# Altium PCB InfoDisplay.PcbDoc (part 2 of 2)
Units mil, origin at the board's own origin, x right, y up, seen from the top; angles counter-clockwise.
Board outline 4606.3 x 1732.28 mil, 2 copper layers (Top Layer, Bottom Layer), stack 65.792 mil thick; 219 components, 174 nets, 685 pads, 194 vias.
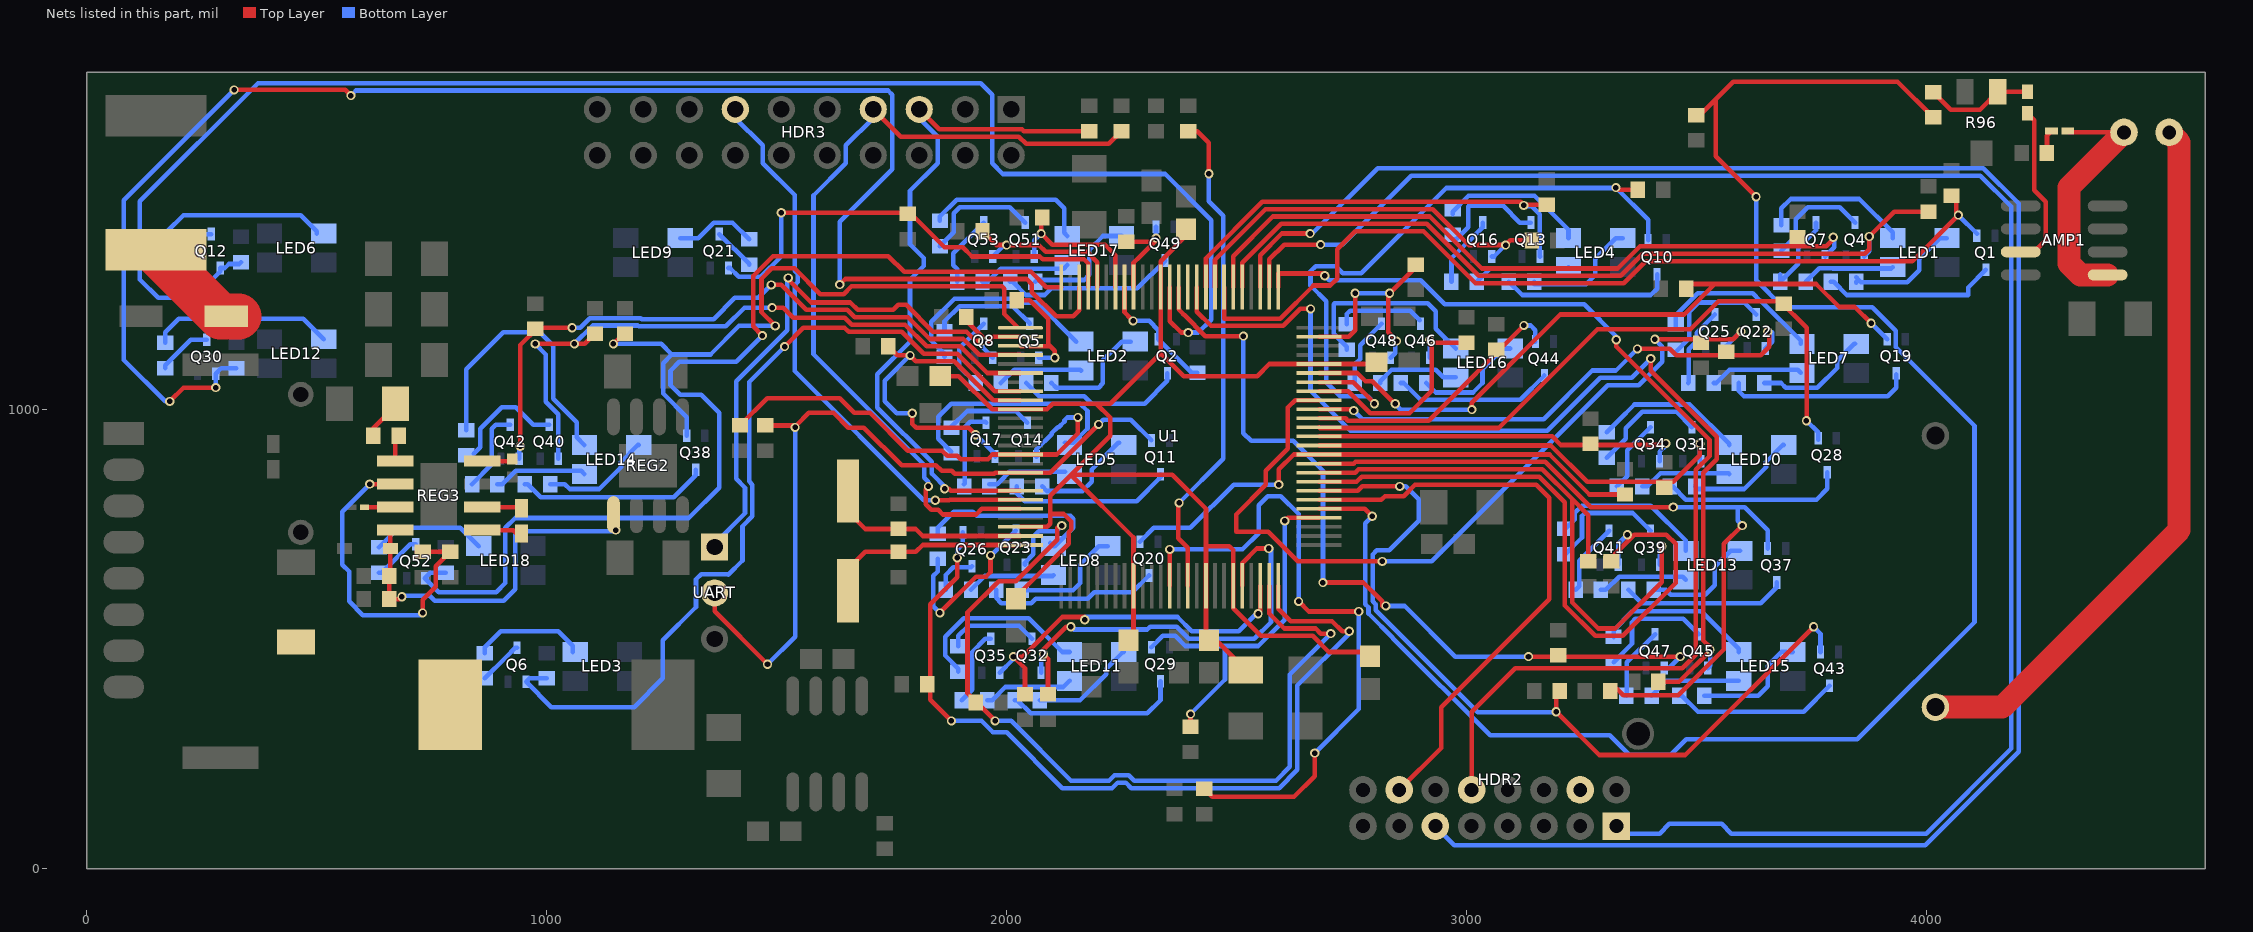
[diagram p2: the nets of this part, all layers, seen from the top]

## Via types
v1: diameter 20, hole 12, Top Layer to Bottom Layer, tented both sides, 181 vias
v2: diameter 19.68, hole 7.87, Top Layer to Bottom Layer, 6 vias
v3: diameter 137.8, hole 98.43, Top Layer to Bottom Layer, 4 vias
v4: diameter 50, hole 28, Top Layer to Bottom Layer, 2 vias
v5: diameter 20, hole 12, Top Layer to Bottom Layer, 1 vias

## Nets (pads, with @x,y where several pads share a name; then routed paths per layer and width w, separated by ;. In a path a pad name is that pad's centre, name@x,y a point inside that pad or via, vN(x,y) a via of type N, cw(c..) or ccw(c..) an arc to the next point about the centre after c; other vN are vias at no path point) (continued)
JTAG_TDI: HDR3.5 R3.1 U1.19 | length 1545.2
  Top Layer w10: HDR3.5@1810,1651.65 1853.47,1608.18 2033.42,1608.18 2037.5,1604.09 R3.1@2180,1604.1 ; v1(1865,826.65) 1874.54,826.65 1878.87,822.32 U1.19@2030,822.32
  Bottom Layer w10: HDR3.5@1810,1651.65 1810,1632.71 1850.53,1592.18 1850.53,1534.87 1790,1474.34 1790,1358.35 1820,1328.35 1820,1310.96 1790,1280.96 1790,1146.35 1719,1075.35 1719,1002.96 1837,884.96 1837,859.65 1870,826.65 v1(1865,826.65)
JTAG_TDO: HDR3.13 U1.20 | length 1236
  Top Layer w10: v1(1845,801.65) 1875,801.65 1875.99,802.64 U1.20@2030,802.64
  Bottom Layer w10: HDR3.13@1410,1651.65 1410,1632.71 1469.47,1573.24 1469.47,1534.87 1539,1465.34 1539,1300.7 1546,1293.7 1546,1276.3 1539,1269.3 1539,1082.65 1820,801.65 v1(1845,801.65)
JTAG_TMS: HDR3.7 R2.1 U1.21 | length 1821.4
  Top Layer w10: HDR3.7@1710,1651.65 1769.47,1592.18 2026.79,1592.18 2042.31,1576.65 2222.56,1576.65 R2.1@2250,1604.1 ; v1(1830,831.65) 1824,825.65 1824,792.96 1836.3,780.65 1851.3,780.65 1861.3,770.65 1933.7,770.65 1946,782.95 U1.21@2030,782.95
  Bottom Layer w10: HDR3.7@1710,1651.65 1710,1632.71 1650.53,1573.24 1650.53,1534.87 1580,1464.34 1580,1119.33 1821,878.33 1821,850.65 1830,841.65 v1(1830,831.65)
LED_B_BATTERY: Q26.2 R71.1 U1.50 | length 1869.8
  Top Layer w10: v1(1880,321.65) 1834,367.65 1834,575.35 1892.5,633.85 v1(1892.5,676.65) ; U1.50@2591.02,615.63 2591.02,565.63 2618,538.65 2707.7,538.65 2729.7,516.65 v1(2745,516.65)
  Bottom Layer w10: v1(1880,321.65) 1945.3,321.65 1970.3,296.65 2000,296.65 2121,175.65 2229.3,175.65 2241.3,187.65 2258.7,187.65 2270.7,175.65 2592.54,175.65 2632,215.11 2632,398.65 2745,511.65 v1(2745,516.65) ; v1(1892.5,676.65) 1892.5,694.15 1905,706.65 Q26.2@1905,731.65
LED_B_BRAKING: Q41.2 R83.1 U1.58 | length 1437.4
  Top Layer w10: U1.58@2679.61,842.01 2760.92,842.01 2771.98,853.06 3158.59,853.06 3214,797.65 3214,572.65 3280,506.65 3340,506.65 3455,621.65 3455,706.65 3435,726.65 3365.3,726.65 3315,676.35 R83.1@3315,669.21
  Bottom Layer w10: Q41.2@3330,661.65 3330,706.65 v1(3350,726.65)
LED_B_CHARGING: Q25.2 R70.1 U1.67 | length 1827.7
  Top Layer w10: U1.67@2679.61,1019.17 2627.52,1019.17 2611.64,1003.29 2611.64,913.29 2564,865.65 2564,835.65 2499,770.65 2499,732.65 2569,732.65 2633,668.65 v1(2817,668.65) ; v1(3410,1151.65) 3580,1151.65 v1(3597.19,1168.85)
  Bottom Layer w10: v1(2817,668.65) 2924.22,668.65 3307.41,1051.84 3375.17,1051.84 3426,1102.67 3426,1135.65 v1(3410,1151.65) ; Q25.2@3560,1131.65 v1(3597.19,1168.85)
LED_B_CLUTCH: Q35.2 R78.1 U1.48 | length 811.1
  Top Layer w10: R78.1@2040,379.21 2040,436.65 v1(2015,461.65) 2035,461.65 2121,547.65 2170,547.65 v1(2170,541.65) ; v1(2546.88,554.77) 2551.65,559.54 U1.48@2551.65,615.63
  Bottom Layer w10: Q35.2@1985.3,426.65 2015,456.35 v1(2015,461.65) ; v1(2170,541.65) 2170,547.65 2371.63,547.65 2402.63,516.65 2505,516.65 2543.12,554.77 v1(2546.88,554.77)
LED_B_DONE: Q48.2 R90.1 U1.74 | length 483.8
  Top Layer w10: U1.74@2679.61,1156.97 2744,1156.97 2758,1170.97 v1(2758,1251.65) ; v1(2847.93,1147.72) 2848.94,1147.72 2830,1166.65 2830,1248.65 v1(2833,1251.65) 2890,1308.65 R90.1@2890,1314.21
  Bottom Layer w10: v1(2758,1251.65) v1(2833,1251.65) ; Q48.2@2835,1111.65 2845,1121.65 2845,1141.65 2850,1146.65 2848.94,1147.72 v1(2847.93,1147.72)
LED_B_ENERGIZED: Q34.2 R77.1 U1.63 | length 807.4
  Top Layer w10: U1.63@2679.61,940.43 3186.48,940.43 3205.26,921.65 3430.35,921.65 v1(3433.73,925.03)
  Bottom Layer w10: Q34.2@3420,886.65 3420,906.65 3433.73,920.38 v1(3433.73,925.03)
LED_B_ENGINE: Q17.2 R64.1 U1.9 | length 765.1
  Top Layer w10: R64.1@1742.56,1136.65 1762.56,1116.65 v1(1790,1116.65) 1802.35,1104.31 1886.24,1104.31 1971.37,1019.17 U1.9@2030,1019.17 ; v1(1794.94,990.65) 1794.94,967.47 1803.42,959 1917.65,959 v1(1932.5,944.15)
  Bottom Layer w10: v1(1790,1116.65) 1735,1061.65 1735,1016.65 1761,990.65 v1(1794.94,990.65) ; v1(1932.5,944.15) 1975,901.65 Q17.2@1975,896.65
LED_B_FUEL: Q47.2 R89.1 U1.87 | length 1769.2
  Top Layer w10: U1.87@2374.49,1265.24 2374.49,1216.56 2379.24,1211.82 2379.24,1211.47 2385.68,1205.02 2386.03,1205.02 2432.4,1158.65 v1(2515,1158.65) ; v1(2688,622.65) 2776,622.65 2817,581.65 2817,571.65 v1(2825,571.65) ; v1(3135,461.65) v1(3465,461.65)
  Bottom Layer w10: v1(2515,1158.65) 2515,947.65 2532,930.65 2623,930.65 2688,865.65 v1(2688,622.65) ; v1(2825,571.65) 2866,571.65 2976,461.65 v1(3135,461.65) ; Q47.2@3430,436.65 3440,436.65 v1(3465,461.65)
LED_B_HYBRID: Q16.2 R63.1 U1.83 | length 871.1
  Top Layer w10: U1.83@2453.23,1265.24 2453.23,1324.88 2563,1434.65 2926.63,1434.65 3004.63,1356.65 v1(3085,1356.65) 3095,1366.65 R63.1@3142.44,1366.65
  Bottom Layer w10: Q16.2@3055,1331.65 3060,1331.65 v1(3085,1356.65)
LED_B_LOGGING: Q42.2 R84.1 U1.4 | length 1455
  Top Layer w10: v1(942.5,919.15) 942.5,1139.15 980,1176.65 v1(1055,1176.65) ; v1(1488.35,1270) 1510,1270 1564.35,1215.65 1653.67,1215.65 1669.67,1199.65 1785.6,1199.65 1832.95,1152.31 1906.12,1152.31 1940.83,1117.6 U1.4@2030,1117.6
  Bottom Layer w10: Q42.2@940,891.65 940,916.65 v1(942.5,919.15) ; v1(1055,1176.65) 1072.37,1176.65 1093.37,1197.65 1204.3,1197.65 1206.3,1195.65 1363,1195.65 1409,1241.65 1460,1241.65 v1(1488.35,1270)
LED_B_MOTOR1: Q53.2 R93.1 U1.96 | length 372.1
  Top Layer w10: R93.1@1947.56,1386.65 1977.56,1356.65 v1(2000,1356.65) 2070,1356.65 2085,1341.65 2175,1341.65 2197.32,1319.33 U1.96@2197.32,1265.24
  Bottom Layer w10: Q53.2@1970,1331.65 1995,1356.65 v1(2000,1356.65)
LED_B_MOTOR2: Q8.2 R39.1 U1.2 UART.1 | length 1354.6
  Top Layer w10: v1(1525,1285) 1521.65,1285 1575,1231.65 1660.3,1231.65 1676.3,1215.65 1753.6,1215.65 1764.39,1226.44 1781.44,1226.44 1839.57,1168.31 1912.75,1168.31 1933.19,1147.87 v1(1947.91,1147.87) ; R39.1@1912.56,1191.65 1947.91,1156.3 v1(1947.91,1147.87) ; U1.2@2030,1156.97 1970.32,1156.97 1961.22,1147.87 v1(1947.91,1147.87)
  Bottom Layer w10: UART.1@1365,700 1365,707.37 1431,773.37 1431,829 1411.65,848.35 1411.65,1060 1523,1171.35 1523,1283 v1(1525,1285) ; v1@1947.91,1146.65 1947.91,1133.74 Q8.2@1970,1111.65 ; v1(1947.91,1147.87) v1@1950.4,1145.38
LED_B_READY: Q7.2 R33.1 U1.81 | length 1558.7
  Top Layer w10: U1.81@2492.6,1265.24 2492.6,1332.53 2578.73,1418.65 2920,1418.65 3033,1305.65 3329,1305.65 3377.5,1354.15 3720,1354.15 ; R33.1@3720,1374.09 3720,1354.15 ; v1(3797.81,1373.71) 3800,1371.52 3782.64,1354.15 3720,1354.15
  Bottom Layer w10: Q7.2@3780,1331.65 3800,1351.65 3800,1371.52 v1(3797.81,1373.71)
LED_G_BATTERY: Q23.2 R69.1 U1.49 | length 1957.7
  Top Layer w10: v1(1975,321.65) 1915,381.65 1915,557.92 1982.73,625.65 2020.15,625.65 2110,715.51 2110,741.65 2115,746.65 v1(2120,746.65) ; U1.49@2571.34,615.63 2571.34,555.32 2604,522.65 2672.06,522.65 2683.06,511.65 v1(2705,511.65)
  Bottom Layer w10: v1(1975,321.65) 2010,321.65 2140,191.65 2222.67,191.65 2234.67,203.65 2265.33,203.65 2277.33,191.65 2585.91,191.65 2616,221.74 2616,422.65 v1(2705,511.65) ; Q23.2@2040,661.65 2040,665.95 2058.33,684.28 2058.33,722.86 2069.78,734.31 2107.65,734.31 v1(2120,746.65) v1@2121.66,746.65
LED_G_BRAKING: Q39.2 R81.1 U1.59 | length 1335.2
  Top Layer w10: U1.59@2679.61,861.69 2757.98,861.69 2765.35,869.06 3165.22,869.06 3230,804.28 ; R81.1@3265,669.21 3265,769.28 3230,804.28 ; v1@3420,701.65 3425,696.65 3425,623.65 3324,522.65 3286.63,522.65 3230,579.28 3230,804.28
  Bottom Layer w10: Q39.2@3420,661.65 v1@3420,701.65
  other v1: 3425,701.65
LED_G_CHARGING: Q22.2 R68.1 U1.66 | length 1149
  Top Layer w10: U1.66@2679.61,999.49 2747.16,999.49 2750,996.65 v1(2755,996.65) ; v1(3372,1130.65) 3442.5,1130.65 3456.18,1116.97 3640.32,1116.97 3658.41,1135.06 v1@3658.41,1167.18 ; v1(3655.33,1167.97) v1@3656.11,1167.18
  Bottom Layer w10: v1(2755,996.65) 2774,977.65 3167.75,977.65 3273.93,1083.84 3325.18,1083.84 v1(3372,1130.65) ; Q22.2@3650,1131.65 3665,1146.65 3665,1166.65 3664.47,1167.18 3656.11,1167.18 v1(3655.33,1167.97)
LED_G_CLUTCH: Q32.2 R76.1 U1.46 | length 970.2
  Top Layer w10: R76.1@2090,379.21 2090,456.65 v1(2080,466.65) 2080,476.65 2130,526.65 v1(2140,526.65) ; U1.46@2512.28,615.63 2512.28,664.65 2544.28,696.65 v1(2570,696.65)
  Bottom Layer w10: Q32.2@2075,426.65 2075,461.65 v1(2080,466.65) ; v1(2140,526.65) 2146.25,520.4 2306.25,520.4 2312.5,526.65 2370,526.65 2396,500.65 2539,500.65 2575,536.65 v1@2575,696.65
LED_G_DONE: Q46.2 R88.1 U1.68 | length 520.5
  Top Layer w10: U1.68@2679.61,1038.86 2742.79,1038.86 2791,990.65 2876.29,990.65 2925,1039.37 2925,1136.65 2920,1141.65 v1(2920,1150.4) ; v1@2920,1151.65 2927.56,1144.09 R88.1@3000,1144.09
  Bottom Layer w10: Q46.2@2920,1111.65 v1(2920,1150.4)
LED_G_ECONOMY: Q6.2 R30.2 U1.8 | length 1853.8
  Top Layer w10: v1(1517,1135.65) 1558,1176.65 1647.42,1176.65 1656.42,1167.65 1772.35,1167.65 1819.69,1120.31 1892.87,1120.31 1974.32,1038.86 U1.8@2030,1038.86
  Bottom Layer w10: R30.2@1000,414.09 962.44,414.09 Q6.2@955,406.65 1010,351.65 1190,351.65 1252.5,414.15 1252.5,497.5 1324.47,569.47 1324.47,629.47 1335.53,640.53 1394.47,640.53 1395,640 1425.53,670.53 1425.53,745.27 1447,766.75 1447,835.63 1440,842.63 1440,1058.65 v1(1517,1135.65)
LED_G_ENERGIZED: Q31.2 R75.1 U1.62 | length 949
  Top Layer w10: U1.62@2679.61,920.75 3183.53,920.75 3262.63,841.65 3450,841.65 3507.53,899.18 v1(3507.53,924.66)
  Bottom Layer w10: v1(3507.53,924.66) 3507.53,889.12 Q31.2@3510,886.65
LED_G_ENGINE: Q14.2 R62.1 U1.15 | length 1009.7
  Top Layer w10: R62.1@1420,964.21 1479.44,1023.65 1636.79,1023.65 1668.79,991.65 1702.88,991.65 1784.88,909.65 1859.58,909.65 1870.58,898.65 1893.05,898.65 1900.55,891.15 1959.45,891.15 1969.36,901.06 U1.15@2030,901.06 2109.41,901.06 2155,946.65 v1(2155,981.65)
  Bottom Layer w10: Q14.2@2065,896.65 2065,911.96 2098.33,945.29 2098.33,947.86 2111.12,960.65 2113.7,960.65 2126,972.96 2126,975.53 2132.12,981.65 v1(2155,981.65)
LED_G_FUEL: Q45.2 R87.1 U1.85 | length 2248.9
  Top Layer w10: U1.85@2413.86,1265.24 2413.86,1211.23 2444.43,1180.65 2602.02,1180.65 2639.02,1217.65 v1(2661,1217.65) ; v1(3401,1109.65) 3401,1083.51 3544.53,939.98 3544.53,890.93 3515,861.4 3515,496.65 3530,481.65 v1(3530,476.65) 3530,474.33 3462.33,406.65 R87.1@3417.56,406.65
  Bottom Layer w10: v1(2661,1217.65) 2661,1039.65 2747.95,952.71 3175.49,952.71 3290.62,1067.84 3359.18,1067.84 v1(3401,1109.65) ; Q45.2@3525,436.65 3530,441.65 v1(3530,476.65) v1@3530,481.65
LED_G_HYBRID: Q13.2 R61.1 U1.84 | length 994.5
  Top Layer w10: U1.84@2433.54,1265.24 2433.54,1327.82 2556.37,1450.65 3118,1450.65 3125.29,1443.36 3125.94,1442.71 v1(3124.64,1442.71) 3126.03,1444.09 R61.1@3175,1444.09
  Bottom Layer w10: v1@3130,1441.65 3129,1441.65 3128,1440.65 3142.34,1440.65 3159.19,1423.81 3159.19,1332.46 Q13.2@3160,1331.65
LED_G_LOGGING: Q40.2 R82.1 U1.6 | length 1473.3
  Top Layer w10: v1(975,1141.65) v1(1060,1141.65) 1082.56,1141.65 R82.1@1105,1164.09 ; v1(1490,1220.59) 1514.06,1220.59 1536,1198.65 1648.05,1198.65 1663.05,1183.65 1778.97,1183.65 1826.32,1136.31 1899.5,1136.31 1957.57,1078.23 U1.6@2030,1078.23
  Bottom Layer w10: v1(975,1141.65) 998,1118.65 998,1016.03 1025,989.03 Q40.2@1025,891.65 ; v1(1060,1141.65) 1100,1181.65 1197.67,1181.65 1199.67,1179.65 1389,1179.65 1429.94,1220.59 v1(1490,1220.59)
LED_G_MOTOR1: Q51.2 R92.1 U1.94 | length 342
  Top Layer w10: R92.1@2075,1416.65 v1(2075,1381.65) 2099,1357.65 2214,1357.65 2236.69,1334.96 U1.94@2236.69,1265.24
  Bottom Layer w10: Q51.2@2060,1331.65 2060,1366.65 v1(2075,1381.65)
LED_G_MOTOR2: Q5.2 R24.1 U1.3 | length 274.6
  Top Layer w10: R24.1@2022.56,1236.65 2050,1236.65 2090.21,1196.44 2090.21,1141.44 2095,1136.65 ; U1.3@2030.63,1136.65 2095,1136.65 ; v1(2105,1111.65) 2105,1126.65 2095,1136.65
  Bottom Layer w10: Q5.2@2070,1111.65 v1(2105,1111.65)
LED_G_PERFORMANCE: Q52.2 R94.2 U1.100 | length 2278.4
  Top Layer w10: v1(1469,1159.65) 1448.7,1179.95 1448.7,1289.31 1492.05,1332.65 1743,1332.65 1777,1298.65 2053,1298.65 2086.42,1265.24 U1.100@2118.58,1265.24
  Bottom Layer w10: R94.2@780,644.09 746.81,644.09 Q52.2@734.69,631.97 765,601.65 890,601.65 910,621.65 910,741.65 931.29,762.95 1308.86,762.95 1375,829.09 1375,991.65 1336,1030.65 1290.09,1030.65 1269,1051.74 1269,1083.65 1288,1102.65 1412,1102.65 v1(1469,1159.65)
LED_G_READY: Q4.2 R21.1 U1.80 | length 1749.2
  Top Layer w10: U1.80@2512.28,1265.24 2512.28,1317.94 2597,1402.65 2913.37,1402.65 3026.37,1289.65 3335.63,1289.65 3383.63,1337.65 3866,1337.65 3876.15,1347.81 v1(3876.15,1375.17) 3930.07,1429.09 R21.1@4005,1429.09
  Bottom Layer w10: Q4.2@3865,1331.65 3876.15,1342.81 v1(3876.15,1375.17)
LED_R_BATTERY: Q20.2 R66.1 U1.61 | length 1188.8
  Top Layer w10: v1(2592,835.65) 2592,868.65 2624.41,901.06 U1.61@2679.61,901.06 3180.59,901.06 3267.56,814.09 R66.1@3345,814.09
  Bottom Layer w10: Q20.2@2290,711.65 2320,741.65 2399.7,741.65 2493.7,835.65 v1(2592,835.65)
LED_R_BRAKING: Q37.2 R79.1 U1.60 | length 1702.9
  Top Layer w10: U1.60@2679.61,881.38 2755.04,881.38 2758.72,885.06 3171.85,885.06 3270.26,786.65 v1(3450,786.65) ; R79.1@3312.56,391.65 3327.56,391.65 3341.28,377.94 3460.98,377.94 3560,476.96 3560,706.65 v1(3600,746.65)
  Bottom Layer w10: v1(3450,786.65) 3590,786.65 ; v1(3600,746.65) 3590,756.65 3590,786.65 ; Q37.2@3655,696.65 3655,736.65 3605,786.65 3590,786.65
LED_R_CHARGING: Q19.2 R65.1 U1.70 | length 1509.2
  Top Layer w10: U1.70@2679.61,1078.23 2763,1078.23 2780.58,1060.65 2795,1060.65 2844,1011.65 v1(2845,1011.65) ; v1(3012,998.65) 3012,1013.65 3204,1205.65 3474,1205.65 3540.31,1271.96 ; R65.1@3477.56,1261.65 3487.87,1271.96 3540.31,1271.96 ; v1(3880,1186.65) 3844.81,1221.85 3810.43,1221.85 3760.32,1271.96 3540.31,1271.96
  Bottom Layer w10: v1(2845,1011.65) 2844,1011.65 2857,998.65 v1(3012,998.65) ; v1(3880,1186.65) Q19.2@3915,1151.65
LED_R_CLUTCH: Q29.2 R73.1 U1.54 | length 831.8
  Top Layer w10: R73.1@2400,309.21 v1(2400,336.65) ; v1(2605,756.65) 2611.62,763.27 U1.54@2679.61,763.27
  Bottom Layer w10: Q29.2@2315,481.65 2340,506.65 2366.58,506.65 2388.58,484.65 2475,484.65 ; v1(2400,336.65) 2475,411.65 2475,484.65 ; v1(2605,756.65) 2605,541.96 2547.7,484.65 2475,484.65
LED_R_DONE: Q44.2 R86.1 U1.65 | length 587.4
  Top Layer w10: U1.65@2679.61,979.8 2737.15,979.8 2742.3,974.65 2918,974.65 v1(3125,1181.65)
  Bottom Layer w10: v1(3125,1181.65) 3140,1181.65 3150,1171.65 Q44.2@3150,1146.65
LED_R_ENERGIZED: Q28.2 R72.1 U1.64 | length 1453.2
  Top Layer w10: U1.64@2679.61,960.12 2681.07,958.65 3070,958.65 3285,1173.65 3487.26,1173.65 3548.26,1234.65 3682,1234.65 3740,1176.65 v1@3740,974.68
  Bottom Layer w10: v1(3739.5,974.68) 3764.98,949.21 Q28.2@3764.98,933.39
LED_R_ENGINE: Q11.2 R56.1 U1.17 UART.2 | length 1721.2
  Top Layer w10: UART.2@1365,600 1365,560 v5(1480,445) ; R56.1@1475,964.21 v1@1542.26,964.21 ; v1(1540,960) 1540,961.96 v1@1542.26,964.21 ; v1(2200,966.65) 2095.04,861.69 U1.17@2030,861.69 1975.25,861.69 1972.71,859.15 1887.29,859.15 1881.07,865.38 1858.6,865.38 1846.33,877.65 1771.63,877.65 1689.63,959.65 1655.54,959.65 1623.54,991.65 1569.7,991.65 v1@1542.26,964.21
  Bottom Layer w10: v5(1480,445) 1540,505 v1(1540,960) ; v1(2200,966.65) 2210,976.65 2270,976.65 Q11.2@2315,931.65
LED_R_FAULT: Q12.2 R60.1 U1.88 | length 3493.3
  Top Layer w10: U1.88@2354.8,1265.24 2354.8,1191.25 2379.7,1166.35 v1(2395,1166.35)
  Bottom Layer w10: R60.1@335,1319.09 331.34,1315.43 308.78,1315.43 300,1306.65 Q12.2@290,1306.65 290,1298.97 232.69,1241.65 155,1241.65 115,1281.65 115,1451.65 372,1708.65 1944,1708.65 1969,1683.65 1969,1534.13 1992,1511.13 2344.83,1511.13 2445,1410.96 2445,1194.26 2417.09,1166.35 v1(2395,1166.35)
LED_R_FUEL: Q43.2 R85.1 U1.57 | length 1847.1
  Top Layer w10: U1.57@2679.61,822.32 2763.86,822.32 2773.19,831.65 v1(2855,831.65) ; R85.1@3202.56,391.65 3195,384.09 v1(3195,341.65) 3289,247.65 3476,247.65 v1(3755,526.65)
  Bottom Layer w10: v1(2855,831.65) 2868,831.65 2896,803.65 2896,756.74 2832.21,692.95 2805.3,692.95 2796,683.65 2796,581.98 2803,574.98 2803,561.98 3024.33,340.65 3195,340.65 v1(3195,341.65) ; v1(3755,526.65) 3770,511.65 Q43.2@3770,471.65
LED_R_GROUND: Q21.2 R67.1 U1.97 | length 1000.8
  Top Layer w10: v1(1510,1426.65) 1790,1426.65 1865,1351.65 1904.7,1351.65 1924.7,1331.65 2072.37,1331.65 2078.37,1325.65 2168.37,1325.65 2177.64,1316.39 U1.97@2177.64,1265.24
  Bottom Layer w10: Q21.2@1395,1306.65 1398.42,1306.65 1417.73,1287.35 1465.69,1287.35 1510,1331.65 v1(1510,1426.65)
LED_R_HYBRID: Q10.2 R42.1 U1.69 | length 1464
  Top Layer w10: U1.69@2679.61,1058.54 2754.11,1058.54 2800,1012.65 v1(2800,1011.65) ; v1(3325,1481.65) 3330,1476.65 R42.1@3372.44,1476.65
  Bottom Layer w10: v1(2800,1011.65) 2800,1012.65 2785,1027.65 2726,1027.65 2695.28,1058.37 2695.28,1234.37 2661,1268.65 2661,1299.65 2672,1310.65 2716,1310.65 2731,1295.65 2771,1295.65 2956,1480.65 v1@3325,1480.65 ; v1@3326,1480.65 3395,1411.65 Q10.2@3395,1366.65
LED_R_LOGGING: Q38.2 R80.1 U1.1 | length 1406.7
  Top Layer w10: v1(1145,1141.65) 1167.44,1164.09 R80.1@1170,1164.09 ; v1(1497,1180.65) 1467,1210.65 1467,1283.65 1489.35,1306 1538.65,1306 1595,1249.65 1645.7,1249.65 1662.7,1266.65 1990,1266.65 1995,1261.65 1995,1206.65 U1.1@2022.5,1179.15
  Bottom Layer w10: v1(1145,1141.65) 1249,1141.65 1272,1118.65 ; Q38.2@1304.37,941.65 1304.37,982.28 1253,1033.65 1253,1099.65 1272,1118.65 ; v1(1497,1180.65) 1418,1180.65 1356,1118.65 1272,1118.65
LED_R_MOTOR1: Q49.2 R91.1 U1.92 | length 214.3
  Top Layer w10: R91.1@2260,1364.09 v1@2322.44,1364.09 ; U1.92@2276.06,1265.24 2276.06,1318.02 2283.49,1325.45 2283.8,1325.45 v1@2322.44,1364.09 ; v1(2325,1371.65) 2325,1366.65 v1@2322.44,1364.09
  Bottom Layer w10: v1(2325,1371.65) Q49.2@2325,1396.65
LED_R_MOTOR2: Q2.2 R15.1 U1.93 | length 272.6
  Top Layer w10: U1.93@2256.38,1265.24 2256.38,1210.28 v1@2270,1196.65
  Bottom Layer w10: v1(2275,1191.65) 2310,1191.65 2330,1171.65 Q2.2@2330,1151.65 2402.56,1079.09 R15.1@2415,1079.09
LED_R_READY: Q1.2 R9.1 U1.82 | length 1995.6
  Top Layer w10: U1.82@2472.91,1265.24 2472.91,1196.65 2595.39,1196.65 2667.39,1268.65 2704,1268.65 2719,1283.65 2719,1347.65 2758,1386.65 2906.75,1386.65 3019.75,1273.65 3342.26,1273.65 3390.26,1321.65 3970,1321.65 v1(4070,1421.65) 4065,1426.65 4065,1454.09 R9.1@4055,1464.09
  Bottom Layer w10: v1(4070,1421.65) Q1.2@4110.31,1381.34
LED_R_WARNING: Q30.2 R74.1 U1.98 | length 3547
  Top Layer w10: v1(180,1016.65) 210,1046.65 v1(280,1046.65) ; v1(320,1694.07) 561.58,1694.07 v1(574,1681.65) ; v1(1637,1270.65) 1649,1282.65 2044,1282.65 2055,1271.65 2055,1254.28 2107.63,1201.65 2145,1201.65 2157.95,1214.61 U1.98@2157.95,1265.24
  Bottom Layer w10: v1(180,1016.65) 170,1016.65 80,1106.65 80,1454.07 v1(320,1694.07) ; v1(280,1046.65) Q30.2@280,1076.65 292.44,1089.09 R74.1@325,1089.09 ; v1(574,1681.65) 585,1692.65 1742,1692.65 1751,1683.65 1751,1521.65 1637,1407.65 v1(1637,1270.65)
NetAMP1_3: AMP1.3 C26.2 | length 357.8
  Top Layer w10: AMP1.3@4205.51,1341.65 4235,1341.65 4260,1366.65 4260,1450.92 4235,1475.92 4235,1628.03 C26.2@4220,1643.03
NetAMP1_5: AMP1.5 C27.1 C28.2 | length 553
  Top Layer w10: C28.2@4307.72,1604.37 4310.43,1601.65 C27.1@4430,1601.65
  Top Layer w50: AMP1.5@4394.49,1291.65 4335,1291.65 4310,1316.65 4310,1481.65 C27.1@4430,1601.65
NetC16_1: C16.1 C17.1 C18.1 C19.1 C20.1 C21.1 C22.1 C25.1 U1.10 U1.23 U1.34 U1.42 U1.45 U1.71 U1.89 | length 3741.3
  Top Layer w10: C17.1@1855.43,1071.65 1896.27,1071.65 1968.43,999.49 U1.10@2030,999.49 2087.84,999.49 2100,1011.65 2195,1011.65 ; C22.1@2020,602.09 2030.43,602.09 2135,706.65 2135,731.96 2141,737.96 2141,755.35 2124.7,771.65 2095,771.65 ; U1.23@2030,743.58 2086.93,743.58 ; 2088,743.58 2095,750.58 2095,771.65 ; 2140,856.65 2360,856.65 2433.54,783.11 U1.42@2433.54,615.63 ; 2142.5,854.16 2276.06,720.59 U1.34@2276.06,615.63 2276.06,498.15 2275,497.09 C18.1@2265,497.09 ; C20.1@2390,1391.22 2390,1376.22 2335,1321.22 2335,1121.65 ; 2433.54,668.2 U1.42@2433.54,615.63 ; 2436.14,701.65 2484.37,701.65 2492.6,693.43 U1.45@2492.6,615.63 2492.6,566.61 2552.55,506.65 2665.43,506.65 2700.43,471.65 2790,471.65 C19.1@2790,462.09 C19.1@2790,460.12 ; C16.1@2520,432.68 2460,492.68 2444.41,492.68 C25.1@2440,497.09 2433.54,503.55 U1.42@2433.54,615.63 ; C21.1@2804.57,1101.65 2800.83,1097.91 U1.71@2679.61,1097.91 2571.26,1097.91 2545,1071.65 2385,1071.65 2335,1121.65 ; 2095,771.65 2095,811.65 2225,941.65 2225,981.65 2195,1011.65 ; 2195,1011.65 2225,1011.65 2335,1121.65
NetC26_1: C26.1 R95.1 R96.1 | length 236.9
  Top Layer w10: R95.1@4015,1689.21 4053.01,1651.21 4116.87,1651.21 R96.1@4155.43,1689.76 4219.49,1689.76 C26.1@4220,1690.28
NetC27_2: C27.2 SPK1.1 | length 1563.5
  Top Layer w50: SPK1.1@4020,351.65 4165.2,351.65 4550,736.46 4550,1580.08 C27.2@4528.43,1601.65
NetC28_1: C28.1 R97.1 | length 51.7
  Top Layer w10: R97.1@4262.56,1556.65 4262.56,1594.65 C28.1@4272.28,1604.37
NetC33_1: C33.1 REG3.2 | length 90.7
  Top Layer w10: REG3.2@859.49,786.65 932.56,786.65 C33.1@945,774.21
NetC33_2: C33.2 L1.1 REG3.1 ZD3.K | length 92.8
  Top Layer w10: REG3.1@859.49,736.65 927.44,736.65 C33.2@945,719.09
NetC35_1: C35.1 R105.1 | length 85.1
  Top Layer w10: R105.1@622.44,941.65 622.44,958.07 C35.1@671.02,1006.65
NetC36_1: C36.1 REG3.7 | length 66.7
  Top Layer w10: C36.1@603.78,786.65 REG3.7@670.51,786.65
NetLED1_1: LED1.1 R7.2 | length 273
  Bottom Layer w10: R7.2@3847.56,1274.65 R7.2@3847.56,1276.65 ; LED1.1@4045,1371.65 4030,1371.65 3985,1326.65 3985,1302 3959.01,1276.01 R7.2@3858.2,1276.01 ; R7.2@3852.56,1281.65 3847.56,1286.65 R7.2@3852.56,1281.65 ; R7.2@3852.56,1281.65 R7.2@3858.2,1276.01 ; R7.2@3852.56,1281.65 R7.2@3858.2,1276.01
NetLED1_3: LED1.3 R13.2 | length 202.9
  Bottom Layer w10: R13.2@3737.56,1276.65 3766.95,1306.05 3795.91,1306.05 3796.3,1305.65 3923.88,1305.65 LED1.3@3926.89,1308.66
NetLED1_4: LED1.4 R10.2 | length 330.1
  Bottom Layer w10: R10.2@3685,1399.21 3685,1436.65 3705,1456.65 3854.3,1456.65 3926.89,1384.06 LED1.4@3926.89,1371.65
NetLED2_1: LED2.1 R8.2 | length 247.3
  Bottom Layer w10: R8.2@2097.56,1056.65 2107.56,1046.65 2200,1046.65 2209,1055.65 2209,1105.65 2250,1146.65 LED2.1@2270,1146.65
NetLED2_3: LED2.3 R14.2 | length 186.9
  Bottom Layer w10: R14.2@1987.56,1056.65 2016.28,1085.37 2160.18,1085.37 LED2.3@2161.89,1083.66
NetLED2_4: LED2.4 R11.2 | length 462.4
  Bottom Layer w10: R11.2@1865,1114.09 1865,1120.19 1836.28,1148.91 1836.28,1189.52 1886.6,1239.84 2021.82,1239.84 2030,1231.65 2066.89,1231.65 LED2.4@2151.89,1146.65
NetLED3_4: LED3.4 R12.2 | length 245.1
  Bottom Layer w10: R12.2@865,469.21 865,481.65 900,516.65 1025,516.65 1056.89,484.76 LED3.4@1056.89,471.65
NetLED4_1: LED4.1 R16.2 | length 259.4
  Bottom Layer w10: R16.2@3147.56,1276.65 3147.56,1271.65 3260,1271.65 3280,1291.65 3280,1326.65 3325,1371.65 LED4.1@3340,1371.65
NetLED4_3: LED4.3 R22.2 | length 212.6
  Bottom Layer w10: R22.2@3022.56,1276.65 3051.56,1305.65 3218.88,1305.65 LED4.3@3221.89,1308.66
NetLED4_4: LED4.4 R19.2 | length 320
  Bottom Layer w10: R19.2@2970,1424.21 2970,1429.28 3004.43,1463.71 3147.94,1463.71 3221.89,1389.76 LED4.4@3221.89,1371.65
NetLED5_1: LED5.1 R17.2 | length 230.8
  Bottom Layer w10: R17.2@2077.56,831.65 2087.56,821.65 2165,821.65 2185,841.65 2185,868.43 2243.22,926.65 LED5.1@2245,926.65
NetLED5_3: LED5.3 R23.2 | length 176.4
  Bottom Layer w10: R23.2@1962.56,836.65 1980,836.65 1995.69,852.35 1995.69,853.93 2005.43,863.66 LED5.3@2126.89,863.66
NetLED5_4: LED5.4 R20.2 | length 531.4
  Bottom Layer w10: R20.2@1880,906.65 1851.28,935.37 1851.28,982.94 1880,1011.65 2160,1011.65 2176,995.65 2176,957.65 2145,926.65 LED5.4@2126.89,926.65
NetLED6_1: LED6.1 R18.2 | length 371.4
  Bottom Layer w10: R18.2@175,1374.21 175,1386.65 210,1421.65 465,1421.65 500,1386.65 LED6.1@500,1381.65
NetLED7_1: LED7.1 R25.2 | length 250.7
  Bottom Layer w10: R25.2@3647.56,1056.65 3684.13,1056.65 3694.77,1046.01 3763.32,1046.01 3806.44,1089.13 3806.44,1104.87 3843.22,1141.65 LED7.1@3845,1141.65
NetLED7_3: LED7.3 R31.2 | length 204
  Bottom Layer w10: R31.2@3537.56,1056.65 3543.42,1056.65 3572.14,1085.37 3720.18,1085.37 LED7.3@3726.89,1078.66
NetLED7_4: LED7.4 R28.2 | length 366.1
  Bottom Layer w10: R28.2@3455,1179.21 3455,1203.58 3503.08,1251.65 3622.37,1251.65 3638.37,1235.65 3640.3,1235.65 3726.89,1149.06 LED7.4@3726.89,1141.65
NetLED8_1: LED8.1 R26.2 | length 250.8
  Bottom Layer w10: R26.2@2032.56,606.65 2033.2,606.01 2144.35,606.01 2160,621.65 2160,661.65 2200,701.65 LED8.1@2220,701.65
NetLED8_3: LED8.3 R32.2 | length 192.6
  Bottom Layer w10: R32.2@1922.56,606.65 1952.78,636.87 2100.1,636.87 LED8.3@2101.89,638.66
NetLED8_4: LED8.4 R29.2 | length 417.6
  Bottom Layer w10: R29.2@1850,729.21 1850,741.96 1884.7,776.65 1926.28,776.65 1935.28,767.65 2139,767.65 2145,761.65 2145,741.96 2104.7,701.65 LED8.4@2101.89,701.65 LED8.4@2095,708.54
NetLED9_1: LED9.1 R27.2 | length 178.8
  Bottom Layer w10: LED9.1@1290,1371.65 1329.29,1371.65 1362.89,1405.25 1403.96,1405.25 R27.2@1440,1369.21
NetLED10_1: LED10.1 R34.2 | length 241.1
  Bottom Layer w10: R34.2@3497.56,831.65 3503.2,826.01 3604.01,826.01 3651.44,873.44 3651.44,884.87 3688.22,921.65 LED10.1@3690,921.65
NetLED10_3: LED10.3 R40.2 | length 201.9
  Bottom Layer w10: R40.2@3382.56,831.65 3393.42,831.65 3422.14,860.37 3570.18,860.37 LED10.3@3571.89,858.66
NetLED10_4: LED10.4 R37.2 | length 329.9
  Bottom Layer w10: R37.2@3305,949.21 3330.44,974.65 3365.62,1009.84 3486.12,1009.84 3571.89,924.06 LED10.4@3571.89,921.65
NetLED11_1: LED11.1 R35.2 | length 232.6
  Bottom Layer w10: R35.2@2072.56,366.65 2159.65,366.65 2216.44,423.44 2216.44,434.87 2253.22,471.65 LED11.1@2255,471.65
NetLED11_3: LED11.3 R41.2 | length 196.7
  Bottom Layer w10: R41.2@1957.56,366.65 1968.42,366.65 1997.14,395.37 2123.6,395.37 LED11.3@2136.89,408.66
NetLED11_4: LED11.4 R38.2 | length 404.9
  Bottom Layer w10: R38.2@1895,429.09 1895,435.19 1866.28,463.91 1866.28,504.52 1906.6,544.84 2048.16,544.84 2121.34,471.65 LED11.4@2136.89,471.65
NetLED12_1: LED12.1 R36.2 | length 398.5
  Bottom Layer w10: R36.2@170,1144.21 170,1166.65 200,1196.65 470,1196.65 LED12.1@515,1151.65
NetLED13_1: LED13.1 R43.2 | length 254.9
  Bottom Layer w10: R43.2@3407.56,606.65 3434.13,606.65 3444.77,596.01 3519.35,596.01 3540,616.65 3540,656.65 3575,691.65 LED13.1@3595,691.65
NetLED13_3: LED13.3 R47.2 | length 199
  Bottom Layer w10: R47.2@3292.56,606.65 3303.42,606.65 3332.14,635.37 3470.18,635.37 LED13.3@3476.89,628.66
NetLED13_4: LED13.4 R45.2 | length 345.1
  Bottom Layer w10: R45.2@3215,739.21 3235.44,759.65 3235.44,774.02 3251.26,789.84 3401.12,789.84 3476.89,714.06 LED13.4@3476.89,691.65
NetLED14_1: LED14.1 R44.2 | length 243.2
  Bottom Layer w10: R44.2@1007.56,836.65 1039.13,836.65 1049.77,826.01 1114.01,826.01 1161.44,873.44 1161.44,884.87 1198.22,921.65 LED14.1@1200,921.65
NetLED14_3: LED14.3 R48.2 | length 204
  Bottom Layer w10: R48.2@892.56,836.65 903.42,836.65 932.14,865.37 1075.18,865.37 LED14.3@1081.89,858.66
NetLED14_4: LED14.4 R46.2 | length 610.7
  Bottom Layer w10: R46.2@825,954.21 825,1086.65 905,1166.65 985,1166.65 1014,1137.65 1014,1022.65 1065,971.65 1065,938.54 LED14.4@1081.89,921.65
NetLED15_1: LED15.1 R49.2 | length 258.7
  Bottom Layer w10: R49.2@3517.56,376.65 3518.2,376.01 3634.35,376.01 3655,396.65 3655,441.65 3685,471.65 LED15.1@3710,471.65
NetLED15_3: LED15.3 R53.2 | length 202.6
  Bottom Layer w10: R53.2@3402.56,376.65 3434.57,408.66 LED15.3@3591.89,408.66
NetLED15_4: LED15.4 R51.2 | length 344.6
  Bottom Layer w10: R51.2@3320,504.21 3320,519.28 3360.56,559.84 3511.12,559.84 3591.89,479.06 LED15.4@3591.89,471.65
NetLED16_1: LED16.1 R50.2 | length 248.2
  Bottom Layer w10: R50.2@2912.56,1056.65 2933.21,1036.01 3014.35,1036.01 3035,1056.65 3035,1086.65 3080,1131.65 LED16.1@3095,1131.65
NetLED16_3: LED16.3 R54.2 | length 185.6
  Bottom Layer w10: R54.2@2812.56,1056.65 2812.56,1060.79 2837.14,1085.37 2932.86,1085.37 2949.57,1068.66 LED16.3@2976.89,1068.66
NetLED16_4: LED16.4 R52.2 | length 439.7
  Bottom Layer w10: R52.2@2740,1129.09 2740,1135.19 2711.28,1163.91 2711.28,1227.94 2713.18,1229.84 2916.12,1229.84 2933.56,1212.39 2933.56,1174.98 LED16.4@2976.89,1131.65
NetLED17_1: LED17.1 R55.2 | length 260.9
  Bottom Layer w10: R55.2@2062.56,1276.65 2066.48,1280.57 2168.92,1280.57 2180,1291.65 2180,1346.65 2209.57,1376.22 LED17.1@2250,1376.22
NetLED17_3: LED17.3 R59.2 | length 199.5
  Bottom Layer w10: R59.2@1947.56,1276.65 1958.42,1276.65 1987.14,1305.37 2124.03,1305.37 LED17.3@2131.89,1313.23
NetLED17_4: LED17.4 R57.2 | length 365.2
  Bottom Layer w10: R57.2@1855,1409.21 1855,1418.58 1891.26,1454.84 2106.82,1454.84 2125,1436.65 2125,1383.11 LED17.4@2131.89,1376.22
NetLED18_4: LED18.4 R58.2 | length 251
  Bottom Layer w10: R58.2@635,699.21 677.44,741.65 811.89,741.65 LED18.4@851.89,701.65
NetPTC1_1: PTC1.1 ZD1.K | length 234.5
  Top Layer w100: PTC1.1@152.5,1339.15 290,1201.65 ZD1.K@330,1201.65
NetQ1_1: Q1.1 R7.1 | length 381.5
  Bottom Layer w10: R7.1@3792.44,1276.65 3798.54,1276.65 3827.25,1247.94 4091.21,1247.94 4091.21,1264.36 Q1.1@4129.69,1302.84
NetQ2_1: Q2.1 R8.1 | length 363
  Bottom Layer w10: R8.1@2042.44,1056.65 2071.16,1027.94 2168.72,1027.94 2185,1011.65 2300,1011.65 2349.69,1061.34 Q2.1@2349.69,1077.84
NetQ4_1: Q4.1 R10.1 | length 235.4
  Bottom Layer w10: R10.1@3685,1344.1 3716.44,1375.54 3716.44,1413.1 3742.18,1438.84 3811.95,1438.84 Q4.1@3845.32,1405.47
NetQ5_1: Q5.1 R11.1 | length 237.1
  Bottom Layer w10: R11.1@1865,1169.21 1865,1190.95 1897.88,1223.84 2012.82,1223.84 2050.32,1186.34 Q5.1@2050.32,1185.47
NetQ6_1: Q6.1 R12.1 | length 97.8
  Bottom Layer w10: R12.1@865,414.1 910.32,459.41 931.38,480.47 Q6.1@935.32,480.47
NetQ7_1: Q7.1 R13.1 | length 176.9
  Bottom Layer w10: R13.1@3682.44,1292.52 R13.1@3682.44,1276.65 3721.76,1315.97 3721.76,1349.99 3760.32,1388.55 Q7.1@3760.32,1405.47
NetQ8_1: Q8.1 R14.1 | length 165.4
  Bottom Layer w10: R14.1@1932.44,1056.65 1897.23,1091.86 1897.23,1132.39 Q8.1@1950.32,1185.47
NetQ10_1: Q10.1 R16.1 | length 371.1
  Bottom Layer w10: R16.1@3092.44,1276.65 3121.16,1247.94 3401.21,1247.94 3414.68,1261.41 Q10.1@3414.69,1292.84
NetQ11_1: Q11.1 R17.1 | length 362.2
  Bottom Layer w10: R17.1@2022.44,831.65 2022.44,816.65 2039.44,799.65 2283,799.65 2334.69,851.34 Q11.1@2334.69,857.84
NetQ12_1: Q12.1 R18.1 | length 120.7
  Bottom Layer w10: R18.1@175,1319.1 236.38,1380.47 Q12.1@270.32,1380.47
NetQ13_1: Q13.1 R19.1 | length 241.7
  Bottom Layer w10: R19.1@2970,1369.1 2977.44,1369.1 3003.72,1395.37 3003.72,1440.37 3005,1441.65 3080,1441.65 3116.18,1405.47 Q13.1@3140.32,1405.47
NetQ14_1: Q14.1 R20.1 | length 189.8
  Bottom Layer w10: R20.1@1880,961.65 1914,995.65 2020.13,995.65 Q14.1@2045.32,970.47
NetQ16_1: Q16.1 R22.1 | length 156.9
  Bottom Layer w10: R22.1@2967.44,1276.65 2967.44,1327.52 3035.32,1395.39 Q16.1@3035.32,1405.47
NetQ17_1: Q17.1 R23.1 | length 176.7
  Bottom Layer w10: R23.1@1907.44,836.65 1908.72,837.93 1908.72,960.07 1921.3,972.65 1953.13,972.65 Q17.1@1955.32,970.47
NetQ19_1: Q19.1 R25.1 | length 400.7
  Bottom Layer w10: R25.1@3592.44,1056.65 3592.44,1039.21 3603.72,1027.94 3916.21,1027.94 3934.69,1046.41 Q19.1@3934.69,1075.08
NetQ20_1: Q20.1 R26.1 | length 379.2
  Bottom Layer w10: R26.1@1977.44,606.65 1977.44,589.21 1988.72,577.94 2053.99,577.94 2063.7,587.65 2176.8,587.65 2190.8,601.65 2273.5,601.65 Q20.1@2309.69,637.84
NetQ21_1: Q21.1 R27.1 | length 93.2
  Bottom Layer w10: Q21.1@1375.32,1380.47 1440,1315.79 R27.1@1440,1314.1
NetQ22_1: Q22.1 R28.1 | length 264
  Bottom Layer w10: R28.1@3455,1124.1 3485,1154.1 3485,1210.95 3505.7,1231.65 3604.13,1231.65 Q22.1@3630.32,1205.47
NetQ23_1: Q23.1 R29.1 | length 387.8
  Top Layer w10: v1(1855,556.65) 1934,635.65 1955.19,635.65 1965,645.47 v1(1965,681.65)
  Bottom Layer w10: R29.1@1850,674.1 1850,646.65 1840.69,637.35 1840.69,570.96 v1(1855,556.65) ; v1(1965,681.65) 1966.5,681.65 Q23.1@2020.32,735.47
NetQ25_1: Q25.1 R31.1 | length 172.8
  Bottom Layer w10: R31.1@3482.44,1056.65 3483.72,1057.93 3483.72,1130.19 3501,1147.47 3501,1166.16 Q25.1@3540.32,1205.47
NetQ26_1: Q26.1 R32.1 | length 97.4
  Bottom Layer w10: R32.1@1867.44,606.65 1867.44,639.1 1884,655.65 1922.5,655.65 Q26.1@1924.69,657.84
NetQ28_1: Q28.1 R34.1 | length 400.3
  Bottom Layer w10: R34.1@3442.44,831.65 3448.54,831.65 3477.25,802.94 3761.28,802.94 3784.69,826.34 Q28.1@3784.69,862.84
NetQ29_1: Q29.1 R35.1 | length 382.4
  Bottom Layer w10: R35.1@2017.44,366.65 2023.54,366.65 2052.25,337.94 2306.28,337.94 2334.69,366.34 Q29.1@2334.69,407.84
NetQ30_1: Q30.1 R36.1 | length 119.3
  Bottom Layer w10: R36.1@170,1089.1 170,1095.19 225.28,1150.47 Q30.1@260.32,1150.47
NetQ31_1: Q31.1 R37.1 | length 253.7
  Bottom Layer w10: R37.1@3305,894.1 3346.44,935.54 3346.44,958.1 3382.18,993.84 3456.95,993.84 Q31.1@3490.32,960.47
NetQ32_1: Q32.1 R38.1 | length 203.7
  Bottom Layer w10: R38.1@1895,484.21 1895,506.65 1917.18,528.84 2026.95,528.84 Q32.1@2055.32,500.47
NetQ34_1: Q34.1 R40.1 | length 159
  Bottom Layer w10: R40.1@3327.44,831.65 3350,854.21 3350,910.16 Q34.1@3400.32,960.47
NetQ35_1: Q35.1 R41.1 | length 166.9
  Bottom Layer w10: R41.1@1902.44,366.65 1925,389.21 1925,471.65 1953.82,500.47 Q35.1@1965.62,500.47
NetQ37_1: Q37.1 R43.1 | length 358.7
  Bottom Layer w10: R43.1@3352.44,606.65 3381.16,577.94 3640,577.94 3674.69,612.62 Q37.1@3674.69,622.84
NetQ38_1: Q38.1 R44.1 | length 415.4
  Bottom Layer w10: R44.1@952.44,836.65 958.54,836.65 987.25,807.94 1276.28,807.94 1324.06,855.71 Q38.1@1324.06,867.84
NetQ39_1: Q39.1 R45.1 | length 265.8
  Bottom Layer w10: R45.1@3215,684.1 3251.44,720.54 3251.44,767.39 3257.88,773.84 3361.95,773.84 Q39.1@3400.32,735.47
NetQ40_1: Q40.1 R46.1 | length 245.2
  Bottom Layer w10: R46.1@841.22,902.87 855,916.65 855,956.65 902.18,1003.84 932.12,1003.84 970.48,965.47 Q40.1@1005.32,965.47
NetQ41_1: Q41.1 R47.1 | length 159
  Bottom Layer w10: R47.1@3237.44,606.65 3245,614.21 3245,670.16 Q41.1@3310.32,735.47
NetQ42_1: Q42.1 R48.1 | length 181.6
  Bottom Layer w10: R48.1@837.44,836.65 880.32,879.53 880.32,956.97 888.82,965.47 Q42.1@920.32,965.47
NetQ43_1: Q43.1 R49.1 | length 365
  Bottom Layer w10: R49.1@3462.44,376.65 3468.54,376.65 3503.55,341.64 3733.49,341.64 Q43.1@3789.69,397.84
NetQ44_1: Q44.1 R50.1 | length 349.3
  Bottom Layer w10: R50.1@2857.44,1056.65 2863.54,1056.65 2900.18,1020.01 3116.86,1020.01 Q44.1@3169.69,1072.84
NetQ45_1: Q45.1 R51.1 | length 266.2
  Bottom Layer w10: R51.1@3320,449.1 3360,489.1 3360,536.65 3367.18,543.84 3471.95,543.84 Q45.1@3505.32,510.47
NetQ46_1: Q46.1 R52.1 | length 192.1
  Bottom Layer w10: R52.1@2740,1184.21 2740,1206.65 2747.18,1213.84 2877.82,1213.84 Q46.1@2898.25,1193.41
NetQ47_1: Q47.1 R53.1 | length 159.9
  Bottom Layer w10: R53.1@3347.44,376.65 3348.72,377.93 3348.72,448.87 Q47.1@3410.32,510.47
NetQ48_1: Q48.1 R54.1 | length 152.8
  Bottom Layer w10: R54.1@2757.44,1056.65 2757.44,1097.51 2768.72,1108.79 2768.72,1138.87 Q48.1@2815.32,1185.47
NetQ49_1: Q49.1 R55.1 | length 380.2
  Bottom Layer w10: R55.1@2007.44,1276.65 2013.54,1276.65 2042.26,1247.94 2082.86,1247.94 2097.58,1262.65 2284.5,1262.65 Q49.1@2344.69,1322.84
NetQ51_1: Q51.1 R57.1 | length 258.8
  Bottom Layer w10: R57.1@1855,1354.1 1885,1384.1 1885,1425.95 1897.88,1438.84 2006.95,1438.84 Q51.1@2040.32,1405.47
NetQ52_1: Q52.1 R58.1 | length 105.6
  Bottom Layer w10: R58.1@635,644.1 641.18,644.1 702.88,705.79 Q52.1@715,705.79
NetQ53_1: Q53.1 R59.1 | length 159.8
  Bottom Layer w10: R59.1@1892.44,1276.65 1892.44,1304.51 1884,1312.96 1884,1339.16 Q53.1@1950.32,1405.47
NetR102_1: R102.1 R103.2 REG3.6 | length 745.9
  Top Layer w10: v1(615,836.65) REG3.6@670.51,836.65 ; R103.2@717.56,689.21 R103.2@730,689.21 R102.1@790,689.21 758.72,657.93 758.72,613.79 730,585.07 v1(730,556.65)
  Bottom Layer w10: v1(615,836.65) 555,776.65 555,661.65 570,646.65 570,581.65 600,551.65 725,551.65 v1(730,556.65)
NetR104_2: R104.2 REG3.4 | length 60.2
  Top Layer w10: REG3.4@859.49,886.65 R104.2@919.69,886.65
NetR105_2: R105.2 REG3.5 | length 57.9
  Top Layer w10: REG3.5@670.51,886.65 670.51,934.61 R105.2@677.56,941.65
OLED_CS: HDR2.11 U1.78 | length 4385.6
  Top Layer w10: U1.78@2551.65,1265.24 2551.65,1334.68 2598.63,1381.65 v1(2660,1381.65)
  Bottom Layer w10: v1@2665,1381.65 2807,1523.65 4124.33,1523.65 4201,1446.98 4201,255.03 3997.63,51.65 2973.78,51.65 HDR2.11@2932.52,92.91
OLED_DC: HDR2.14 U1.56 | length 1295.7
  Top Layer w10: U1.56@2679.61,802.64 2815,802.64 2823.01,810.65 2863.7,810.65 2888.1,835.06 3151.6,835.06 3180,806.65 3180,586.65 2945,351.65 2945,262.87 HDR2.14@2853.78,171.65
OLED_RES: HDR2.4
OLED_SCLK: HDR2.1 U1.77 | length 3915.4
  Top Layer w10: U1.77@2571.34,1265.24 2571.34,1325.32 2603.68,1357.65 v1(2682.77,1357.65)
  Bottom Layer w10: v1(2682.77,1357.65) 2730.09,1357.65 2880.09,1507.65 4117.7,1507.65 4185,1440.35 4185,261.65 4000,76.65 3576.28,76.65 3555.28,97.65 3441.41,97.65 3420.41,76.65 3342.48,76.65 HDR2.1@3326.22,92.91
OLED_SDIN: HDR2.10 U1.76 | length 2318.3
  Top Layer w10: U1.76@2591.02,1265.24 2591.02,1294.65 2687,1294.65 v1(2692,1289.65) ; HDR2.10@3011.26,171.65 3011.26,341.91 3106,436.65 3469.7,436.65 3499,465.96 3499,868.03 3528.53,897.56 3528.53,933.35 3326,1135.88 v1(3326,1150.65)
  Bottom Layer w10: v1(2692,1289.65) 2702,1279.65 2901,1279.65 2953,1227.65 3256,1227.65 3326,1157.65 v1(3326,1150.65)
PWR_REGULATORWAKE: U1.86
PWR_WAKE: R100.1 R101.2 REG2.5 REG3.8 ZD2.K | length 804.5
  Top Layer w10: R101.2@657.56,636.65 R100.1@657.56,586.65 680,586.65 v1(685,591.65) ; R101.2@660,639.09 ZD2.K@660,696.65 660,726.14 REG3.8@670.51,736.65 ; REG2.5@1145,751.65 REG2.5@1145,770.35
  Bottom Layer w10: v1(685,591.65) 687,593.65 745.33,593.65 756.33,582.65 906,582.65 931.44,608.09 931.44,727.86 937.89,734.31 1147.65,734.31 v1(1150,736.65)
SAM_FWUP: R4.1 U1.40 | length 1080.2
  Top Layer w10: v1(2375,795.65) 2373.71,794.36 2373.71,718.68 2394.17,698.21 U1.40@2394.17,615.63 ; R4.1@2395,1604.1 2414.56,1604.1 2440,1578.65 v1(2440,1511.65)
  Bottom Layer w10: v1(2375,795.65) 2471,891.65 2471,1420.65 2440,1451.65 v1(2440,1511.65)
SAM_TST: R6.2 U1.38 | length 1452.9
  Top Layer w10: U1.38@2354.8,615.63 v1(2354.8,694.65) ; R6.2@2430,174.21 2447.56,156.65 2625,156.65 2670,201.65 v1(2670,251.65) ; v1(2635,581.65) 2657,559.65 v1(2766,559.65)
  Bottom Layer w10: v1(2354.8,694.65) 2513,694.65 2548,729.65 2548,790.65 2568,810.65 2596,810.65 2635,771.65 v1(2635,581.65) ; v1(2670,251.65) 2766,347.65 v1(2766,559.65)
SOUND_OUTPUT: R95.2 R99.2 U1.55 | length 3969
  Top Layer w10: U1.55@2679.61,782.95 2778.7,782.95 v1(2795,766.65) ; R99.2@3500,1639.21 3507.56,1639.21 3542.15,1673.8 ; v1(3630,1461.65) 3542.15,1549.5 3542.15,1673.8 ; R95.2@4015,1634.09 3937.44,1711.65 3580,1711.65 3542.15,1673.8
  Bottom Layer w10: v1(2795,766.65) 2780,751.65 2780,575.35 2787,568.35 2787,555.35 2840,502.35 2840,501.65 3051.5,290.15 3311.96,290.15 3354.41,247.7 3443.95,247.7 3477.9,281.65 3850,281.65 4105,536.65 4105,963.81 3933.87,1134.94 3933.87,1169.99 3882.21,1221.65 3688.42,1221.65 3630,1280.08 v1(3630,1461.65)
XIN: C1.2 U1.25 X1.2 | length 443.3
  Top Layer w10: X1.2@1655,605.12 1655,651.65 1692.56,689.21 C1.2@1765,689.21 1802.56,689.21 1817.56,704.21 U1.25@2030,704.21
XOUT: C2.2 U1.24 X1.1 | length 441.9
  Top Layer w10: X1.1@1655,821.65 1655,776.65 1692.56,739.09 C2.2@1765,739.09 1802.56,739.09 1817.75,723.9 U1.24@2030,723.9
pads on no net: AMP1.1 AMP1.7 AMP1.8 HDR1.A8 HDR1.CHAS HDR2.CHAS HDR3.3 HDR3.11 HDR3.15 HDR3.17 HDR3.19 LED3.1 LED3.3 LED6.3 LED6.4 LED9.3 LED9.4 LED12.3 LED12.4 LED18.1 LED18.3 R96.3 REG2.4 REG2.6 REG2.7 U1.5 U1.7 U1.26 U1.27 U1.28 U1.29 U1.31 U1.32 U1.36 U1.37 U1.47 U1.75 U1.79 U1.99

## Polygon pours and split planes (outlines as drawn)
GND on Bottom Layer "Bottom Layer-No Net" (solid, pour order 4): 0,1732.28 4606.3,1732.28 4606.3,0 0,0
GND on Top Layer "GND_PLANE" (solid, pour order 2): 0,1732.28 4606.3,1732.28 4606.3,0 0,0
GND on Top Layer "Top Layer-No Net" (solid, pour order 3): 1730,911.65 1830,911.65 1830,836.65 1940,816.65 1940,611.65 1830,591.65 1830,516.65 1730,516.65

## Keep-outs
Keep-Out Layer:
  lines w10: 0,1732.28 4606.3,1732.28 4606.3,0 0,0 0,1732.28 ; 0,1732.28 0,1732.28

## Other copper
Top Layer:
  rectangle net 12V0S: 725,721.65 805,1456.65
  rectangle net GND: 400,681.65 585,866.65
  rectangle net GND: 30,681.65 585,816.65
  rectangle net 12V0S: 400,926.65 495,1501.65
  rectangle net 12V0: 30,841.65 155,1231.65
  rectangle net 12V0S: 430,1381.65 925,1501.65
  rectangle net GND: 515,1056.65 670,1366.65
  rectangle net GND: 515,681.65 585,1246.65
  rectangle net NetC33_2: 405,446.65 890,536.65
  rectangle net NetC33_2: 715,251.65 865,536.65
  rectangle net GND: 410,606.65 520,686.65
  rectangle net NetC33_2: 820,611.65 960,751.65
  rectangle net NetC33_2: 820,446.65 960,751.65
  rectangle net GND: 260,296.65 385,816.65
  rectangle net 12V0S: 725,956.65 925,1461.65
  rectangle net 12V0S: 805,911.65 925,961.65
  rectangle net GND: 260,296.65 615,421.65
  rectangle net GND: 490,71.65 615,416.65
  rectangle net GND: 415,71.65 1485,216.65
  rectangle net GND: 970,71.65 1120,1121.65
  rectangle net GND: 820,811.65 1095,866.65
  rectangle net 5V0: 1170,251.65 1425,461.65
  rectangle net GND: 970,821.65 1305,931.65
  rectangle net GND: 1050,1041.65 1190,1121.65
  rectangle net GND: 1055,636.65 1195,716.65
  rectangle net 3V3: 1225,941.65 1310,1131.65
  rectangle net 5V0: 1265,436.65 1310,811.65
  rectangle net 5V0: 1220,451.65 1310,716.65

## Silkscreen, mask and mechanical layers (free items; w line width, h text height)
Top Overlay:
  lines w7: 72.56,56.65 72.56,131.65 111.93,131.65 111.93,81.65 45,81.65 45,111.65 92.24,111.65 92.24,46.65 ; 25.32,31.65 25.32,146.65 130.32,146.65 130.32,31.65 25.32,31.65
  lines w10: 525,796.65 525,791.65 540,776.65 555,776.65 ; 835,646.65 860,621.65 995,621.65 ; 1080,871.65 1080,931.65 ; 1545,26.65 1560,11.65 1815,11.65 ; 2190,1691.65 2200,1701.65 2485,1701.65 ; 2235,371.65 2250,386.65 ; 2320,1536.65 2330,1546.65 2370,1546.65 2450,1466.65 2455,1461.65 2465,1461.65 ; 2325,96.65 2325,91.65 2340,76.65 2410,76.65 2420,86.65 ; 2330,396.65 2330,421.65 2335,426.65 ; 2945,396.65 2950,391.65 3110,391.65 ; 3310,1201.65 3315,1206.65 ; 3355,906.65 3355,931.65 3405,931.65 3410,936.65 ; 3735,1576.65 3740,1571.65 3985,1571.65 4015,1601.65 4235,1601.65
  text "16" at 2620,151.65 h45
  text "2" at 3425,146.65 h45
  text "UWAFT. Team on Back since 1996." at 505,105 h60
  text "BEWW" at 155.32,99.65 h40
  text "15" at 2620,71.65 h45
  text "2015" at 155.32,36.65 h40
  text "InfoDisplay Rev1.0" at 495,26.65 h50
Bottom Overlay:
  lines w10: 1265,801.65 1305,761.65 1305,751.65 1305,366.65 1325,346.65 1590,346.65 ; 1625,311.65 1795,311.65 1855,371.65 ; 1690,661.65 1755,661.65 1805,711.65 1805,776.65 1830,801.65 1875,801.65 ; 2365,631.65 2470,526.65 2615,526.65 ; 2400,1076.65 2405,1071.65 2405,981.65 ; 2410,1331.65 2470,1331.65 2575,1436.65 2775,1436.65 ; 2900,761.65 2900,996.65 2910,1006.65 ; 3225,1436.65 3255,1466.65 3465,1466.65 3480,1481.65 ; 3735,801.65 3735,751.65 3780,706.65 4225,706.65 ; 3745,601.65 3870,476.65 4230,476.65 ; 3765,341.65 3875,231.65 4225,231.65 ; 3937.5,994.15 3950,981.65 4430,981.65 ; 4090,1271.65 4100,1261.65 4510,1261.65

## Text inside footprints (layer, text, board x,y; h text height)
HDR3: Top Overlay "20" at 975,1531.65 h40; Top Overlay "19" at 980,1631.65 h40; Top Overlay "1" at 2095,1626.65 h40; Top Overlay "2" at 2090,1531.65 h40